# Altium PCB RaspberryPi3BP-Layout.pcbdoc
Units mm, origin at the board's own origin, x right, y up, seen from the top; angles counter-clockwise.
Board outline 140.12 x 120.2 mm, 2 copper layers (Top Layer, Bottom Layer); 37 components, 155 nets, 205 pads, 0 vias.
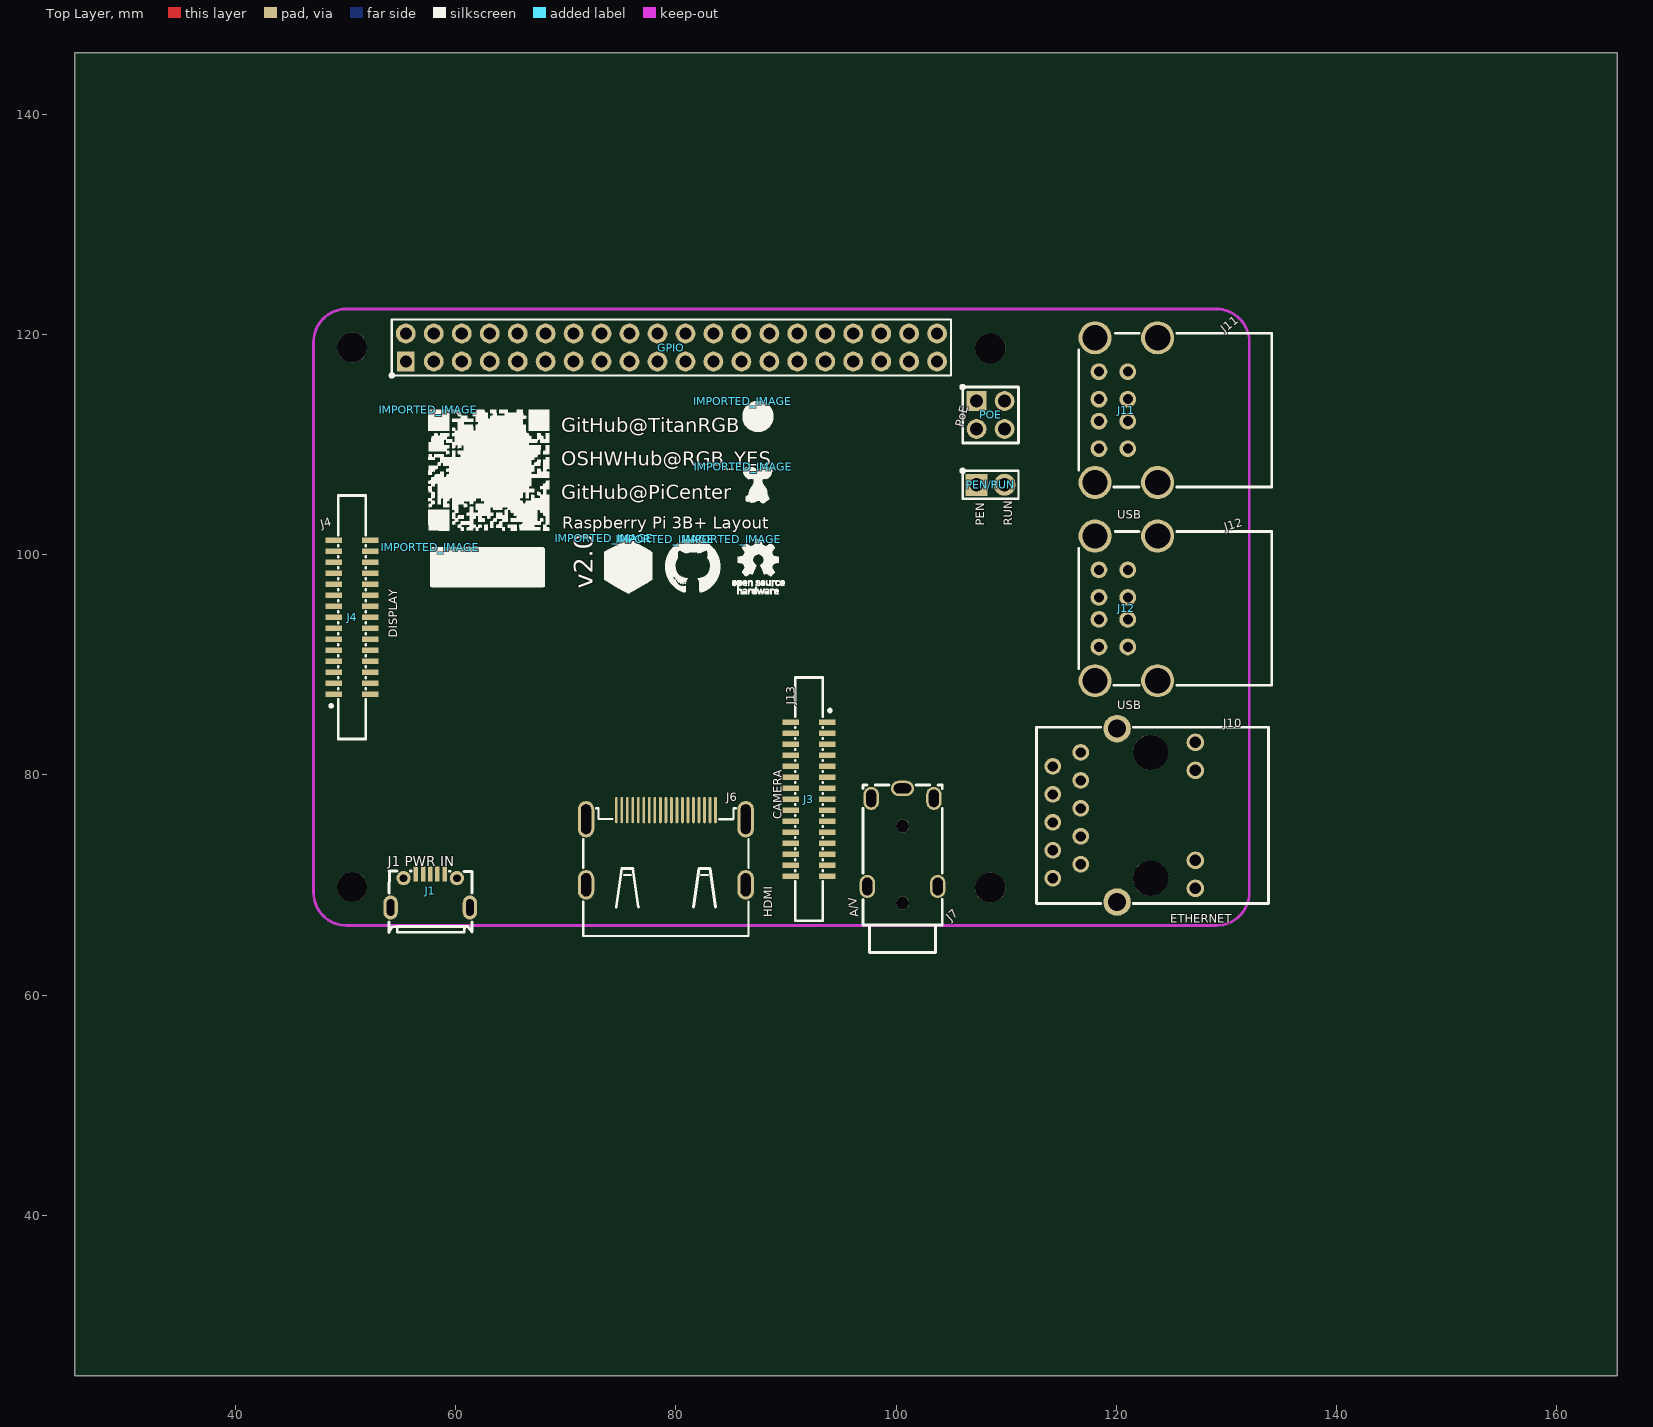
[diagram p0: Top Layer view]
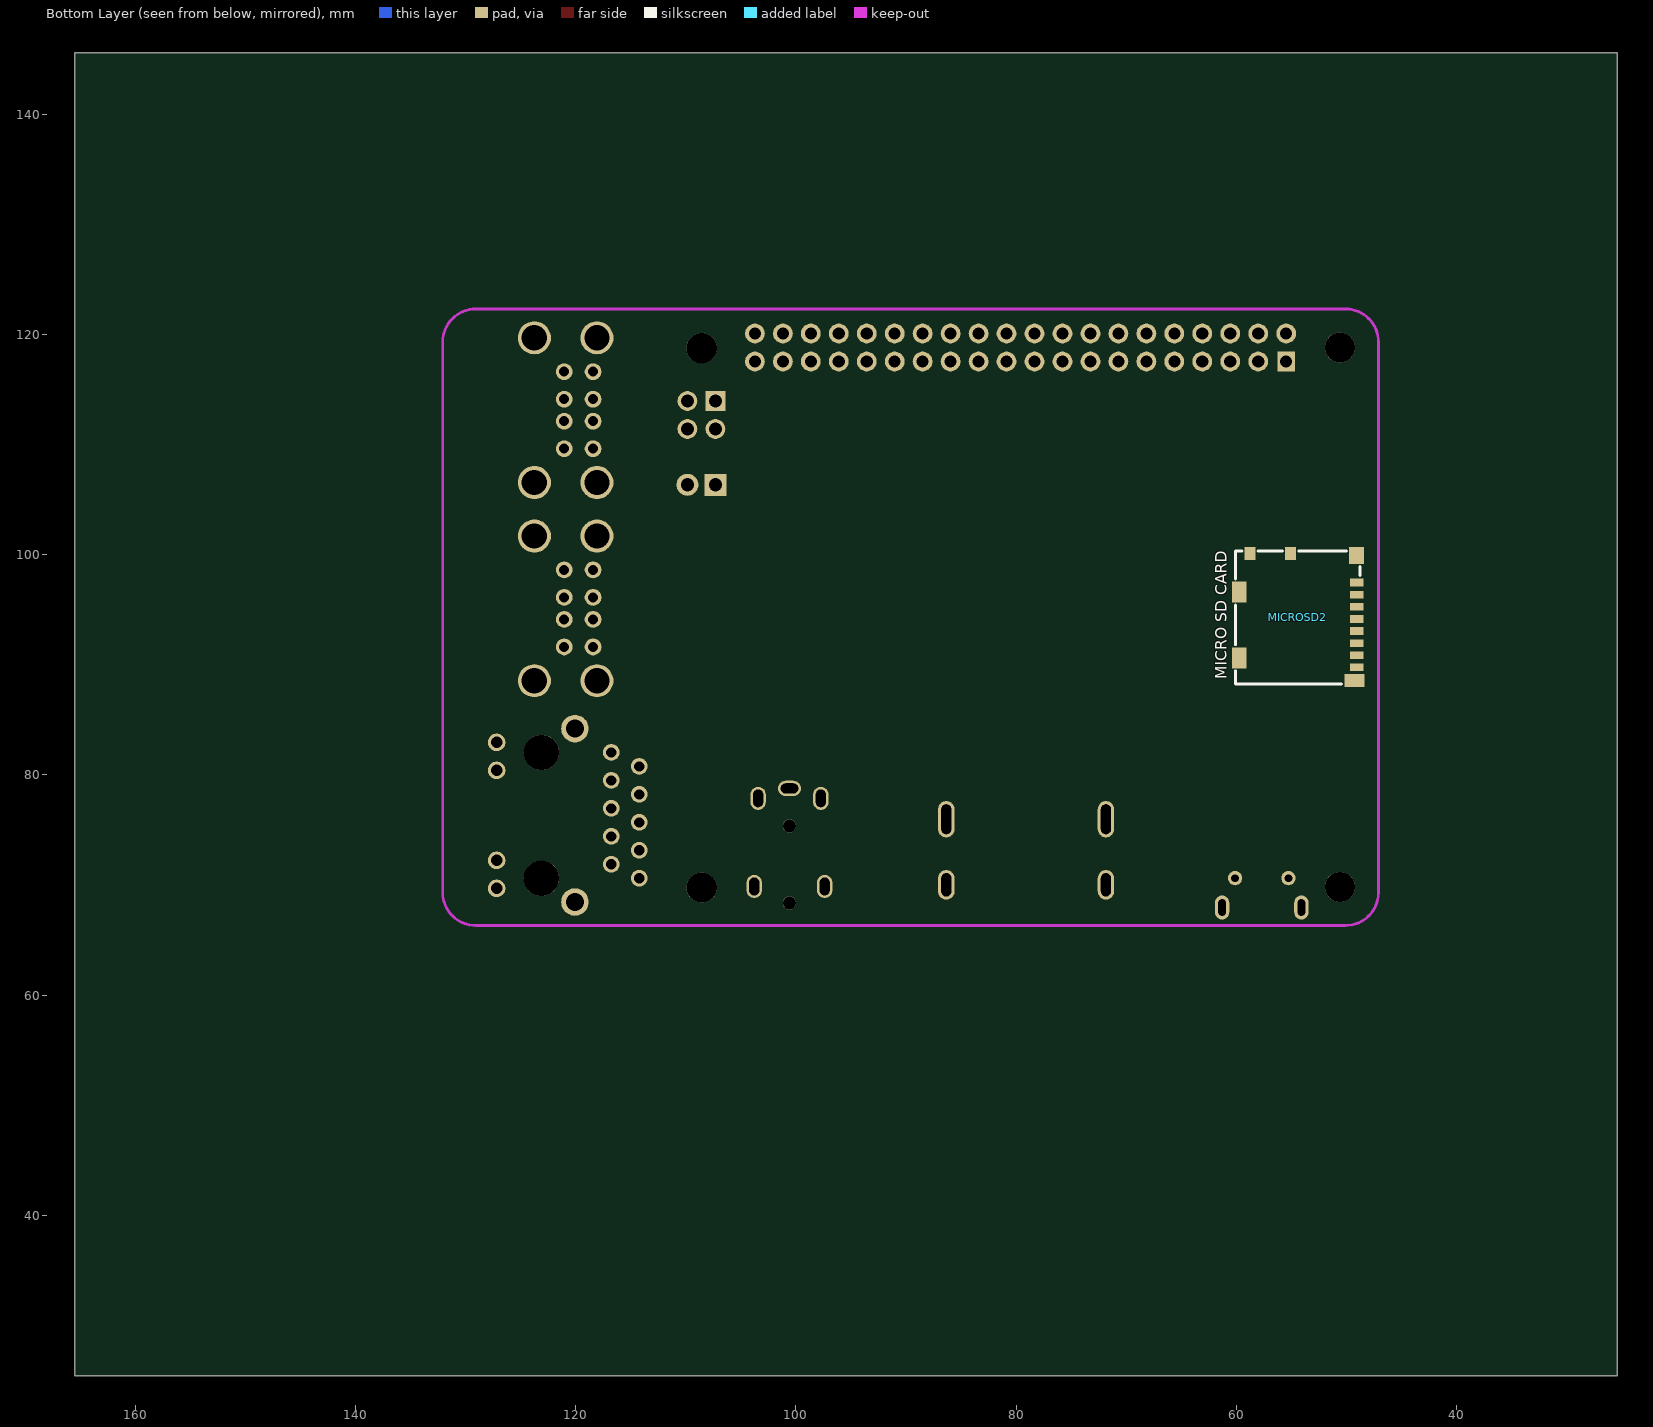
[diagram p1: Bottom Layer view, seen from below]

## Layer stack, top to bottom
Top Layer: signal copper (thickness not stored)
Dielectric: dielectric 0.32, FR-4, Dk 4.8
Bottom Layer: signal copper (thickness not stored)

## Board outline
165.516,25.4 25.4,25.4 25.4,145.599 165.516,145.599

## Components (designator, comment, footprint, x,y, rotation, side; value= is the part's Value field where it differs from the comment)
GPIO "Header-Male-2.54_2x20" HDR-TH_40P-P2.54-V-M-R2-C20-S2.54 79.605,118.821 r0 top
IMPORTED_IMAGE "IMPORTED_IMAGE" IMPORTED_IMAGE 79.039,101.411 r0 top
IMPORTED_IMAGE "IMPORTED_IMAGE" IMPORTED_IMAGE 85.112,101.393 r0 top
IMPORTED_IMAGE "IMPORTED_IMAGE" IMPORTED_IMAGE 86.063,113.959 r0 top
IMPORTED_IMAGE "IMPORTED_IMAGE" IMPORTED_IMAGE 73.505,101.51 r0 top
IMPORTED_IMAGE "IMPORTED_IMAGE" IMPORTED_IMAGE 57.694,100.687 r0 top
IMPORTED_IMAGE "IMPORTED_IMAGE" IMPORTED_IMAGE 86.103,107.982 r0 top
IMPORTED_IMAGE "IMPORTED_IMAGE" IMPORTED_IMAGE 57.511,113.189 r0 top
J1 "PWR IN" MICRO-USB-SMD_MICROXNJ 57.694,69.476 r0 top
J3 "CAMERA" FPC-SMD_15P-P1.00_HDGC_1.0K-GT-15PB 92.094,77.801 r270 top
J4 "DISPLAY" FPC-SMD_15P-P1.00_HDGC_1.0K-GT-15PB 50.593,94.322 r90 top
J6 "HDMI" HDMI-SMD_HDMI-019S 79.097,73.411 r0 top
J7 "A/V" AUDIO-TH_HOOYA_PJ-322 100.593,74.321 r90 top
J10 "ETHERNET" RJ45-TH_XKB_X01AQ068DB2AD 120.715,76.329 r90 top
J11 "USB" USB-A-TH_U-USBAR04P-F201 120.924,113.13 r90 top
J12 "USB" USB-A-TH_U-USBAR04P-F201 120.924,95.124 r90 top
MICROSD2 "1040310811" SIM-SMD_8P-1040310811 54.402,94.332 r270 bottom
PEN/RUN "KH-2.54PH180-1X2P-L11.5" HDR-TH_2P-P2.54-V-M 108.594,106.353 r0 top
POE "210-72-02GB01" HDR-TH_4P-P2.54-V-R2-C2-S2.54_A2541WV-2X2P 108.594,112.692 r270 top
? "" ? 95.091,72.065 r0 top
? "" ? 85.598,58.417 r0 top
? "" ? 42.622,80.315 r0 top
? "" ? 66.605,54.773 r0 top
? "" ? 108.493,61.305 r0 top
? "" ? 113.313,123.73 r0 top
? "" ? 136.933,80.815 r0 top
? "" ? 48.844,99.574 r0 top
? "" ? 99.93,68.049 r0 top
? "" ? 79.594,83.684 r0 top
? "" ? 73.844,55.827 r0 top
? "" ? 52.395,63.594 r0 top
? "" ? 63.094,58.414 r0 top
? "" ? 138.427,71.425 r0 top
? "" ? 134.77,89.8 r0 top
? "" ? 103.718,114.327 r0 top
? "" ? 98.897,120.572 r0 top
? "" ? 100.356,117.51 r0 top

## Footprints (in the part's own frame and the unit in brackets; to place one, negate y for a bottom-side part, rotate by r counter-clockwise, add the part's x,y. Pads: shape width x height; smd on the part's side, far side on the other; paste and mask are expansions set on the pad)
AUDIO-TH_HOOYA_PJ-322 [mm]
  oval 1.4x2.1 hole 0.9 slot 1.6 at 90 deg: 1(4.45,0)
  oval 2.1x1.4 hole 0.9 slot 1.6 at 0 deg: 2(3.55,2.85) 3(-4.45,-3.2) 3(-4.45,3.2) 4(3.55,-2.85)
  round 1.2 hole 1.2 unplated: ""(-5.95,0) ""(1.05,0)
  silkscreen extent -10.45,-3.6 4.75,3.6
FPC-SMD_15P-P1.00_HDGC_1.0K-GT-15PB [mm]
  rect 0.5x1.5 smd: 1(-7,-1.65) 1(-7,1.65) 2(-6,-1.65) 2(-6,1.65) 3(-5,-1.65) 3(-5,1.65) 4(-4,-1.65) 4(-4,1.65) 5(-3,1.65) 5(-3,-1.65) 6(-2,1.65) 6(-2,-1.65) 7(-1,1.65) 7(-1,-1.65) 8(0,1.65) 8(0,-1.65) 9(1,1.65) 9(1,-1.65) 10(2,1.65) 10(2,-1.65) 11(3,1.65) 11(3,-1.65) 12(4,-1.65) 12(4,1.65) 13(5,-1.65) 13(5,1.65) 14(6,-1.65) 14(6,1.65) 15(7,-1.65) 15(7,1.65)
  silkscreen extent -11.05,-1.25 11.05,2.03
HDMI-SMD_HDMI-019S [mm]
  oval 0.25x2.4 smd: 1(4.501,3.396) 2(4.001,3.396) 3(3.501,3.396) 4(3.001,3.396) 5(2.5,3.396) 6(2,3.396) 7(1.5,3.396) 8(1,3.396) 9(0.5,3.396) 10(0,3.396) 11(-0.5,3.396) 12(-1,3.396) 13(-1.5,3.396) 14(-2,3.396) 15(-2.5,3.396) 16(-3.001,3.396) 17(-3.501,3.396) 18(-4.001,3.396) 19(-4.501,3.396)
  oval 1.5x2.7 hole 0.9 slot 2.1 at 90 deg: 20(7.251,-3.397) 21(-7.251,-3.397)
  oval 1.5x3.3 hole 0.9 slot 2.7 at 90 deg: 22(7.251,2.563) 23(-7.251,2.563)
  silkscreen extent -7.5,-8.04 7.5,3.56
HDR-TH_2P-P2.54-V-M [mm]
  rect 2x2 hole 1.2: 1(-1.27,0)
  round 2 hole 1.2: 2(1.27,0)
  silkscreen extent -2.54,-1.27 2.54,1.27
HDR-TH_4P-P2.54-V-R2-C2-S2.54_A2541WV-2X2P [mm]
  rect 1.8x1.8 hole 1.2: 1(-1.27,-1.27)
  round 1.8 hole 1.2: 2(-1.27,1.27) 3(1.27,-1.27) 4(1.27,1.27)
  silkscreen extent -2.54,-2.54 2.54,2.54
HDR-TH_40P-P2.54-V-M-R2-C20-S2.54 [mm]
  rect 1.575x1.8 hole 1.1: 1(-24.13,-1.27)
  round 1.8 hole 1.1: 2(-24.13,1.27) 3(-21.59,-1.27) 4(-21.59,1.27) 5(-19.05,-1.27) 6(-19.05,1.27) 7(-16.51,-1.27) 8(-16.51,1.27) 9(-13.97,-1.27) 10(-13.97,1.27) 11(-11.43,-1.27) 12(-11.43,1.27) 13(-8.89,-1.27) 14(-8.89,1.27) 15(-6.35,-1.27) 16(-6.35,1.27) 17(-3.81,-1.27) 18(-3.81,1.27) 19(-1.27,-1.27) 20(-1.27,1.27) 21(1.27,-1.27) 22(1.27,1.27) 23(3.81,-1.27) 24(3.81,1.27) 25(6.35,-1.27) 26(6.35,1.27) 27(8.89,-1.27) 28(8.89,1.27) 29(11.43,-1.27) 30(11.43,1.27) 31(13.97,-1.27) 32(13.97,1.27) 33(16.51,-1.27) 34(16.51,1.27) 35(19.05,-1.27) 36(19.05,1.27) 37(21.59,-1.27) 38(21.59,1.27) 39(24.13,-1.27) 40(24.13,1.27)
  silkscreen extent -25.4,-2.54 25.4,2.54
IMPORTED_IMAGE [mm]
  silkscreen extent 0,-4.83 4.98,0
MICRO-USB-SMD_MICROXNJ [mm]
  rect 0.4x1.4 smd: 1(-1.3,1.521) 2(-0.65,1.521) 3(0,1.521) 4(0.65,1.521) 5(1.3,1.521)
  round 1.3 hole 0.7: 6(2.425,1.149) 9(-2.425,1.149)
  oval 1.3x2.2 hole 0.7 slot 1.5 at 90 deg: 7(3.6,-1.521) 8(-3.6,-1.521)
  silkscreen extent -3.76,-3.78 3.8,1.79
RJ45-TH_XKB_X01AQ068DB2AD [mil]
  round 60 hole 36: 1(-225,254.92) 2(-175,154.92) 3(-125,254.92) 4(-75,154.92) 5(-25,254.92) 6(25,154.92) 7(75,254.92) 8(125,154.92) 9(175,254.92) 10(225,154.92)
  round 62.99 hole 40.16: 11(-261.02,-254.92) 12(-161.03,-254.92) 13(161.02,-254.92) 14(261.02,-254.92)
  round 98.42 hole 64.96: 15(-310.03,25) 16(310.04,25)
  round 125.98 hole 125.98 unplated: ""(-225,-95.08) ""(225,-95.08)
  silkscreen extent -315,-517 315,313
SIM-SMD_8P-1040310811 [mm]
  rect 0.7x1.2 smd: 1(-3.138,5.338) 2(-2.038,5.338) 3(-0.938,5.338) 4(0.162,5.338) 5(1.262,5.338) 6(2.362,5.338) 7(3.462,5.338) 8(4.562,5.337)
  rect 1.17x1.8 smd: 9(5.772,5.138)
  rect 1.55x1.35 smd: 10(-5.598,5.312)
  rect 1.2x1 smd: 11(-5.773,-0.663) 12(-5.773,-4.363)
  rect 1.9x1.35 smd: 13(-2.273,-5.338) 14(3.697,-5.338)
  silkscreen extent -5.99,-5.67 6.07,5.64
USB-A-TH_U-USBAR04P-F201 [mil]
  round 60 hole 36: 1(-137.8,98.03) 2(-39.37,98.03) 3(39.37,98.03) 4(137.8,98.03) 5(-137.8,-5.12) 6(-39.37,-5.12) 7(39.37,-5.12) 8(137.8,-5.12)
  round 118.11 hole 90.55: 9(-258.66,-111.81) 9(-258.66,111.81) 9(258.66,-111.81) 9(258.66,111.81)
  silkscreen extent -275,-520 275,170
? [mm]

## Free pads (board coordinates)
  round 2.75 hole 2.75 unplated: 1(50.594,69.822) 1(50.594,118.822) 1(108.562,69.766) 1(108.562,118.766)

## Nets (pads, with @x,y where several pads share a name; then routed paths per layer and width w, separated by ;. In a path a pad name is that pad's centre, name@x,y a point inside that pad or via, vN(x,y) a via of type N, cw(c..) or ccw(c..) an arc to the next point about the centre after c; other vN are vias at no path point)
GND: MICROSD2.6 MICROSD2.9 MICROSD2.10 MICROSD2.11 MICROSD2.12 MICROSD2.13 MICROSD2.14
GPIO_1: GPIO.1
GPIO_2: GPIO.2
GPIO_3: GPIO.3
GPIO_4: GPIO.4
GPIO_5: GPIO.5
GPIO_6: GPIO.6
GPIO_7: GPIO.7
GPIO_8: GPIO.8
GPIO_9: GPIO.9
GPIO_10: GPIO.10
GPIO_11: GPIO.11
GPIO_12: GPIO.12
GPIO_13: GPIO.13
GPIO_14: GPIO.14
GPIO_15: GPIO.15
GPIO_16: GPIO.16
GPIO_17: GPIO.17
GPIO_18: GPIO.18
GPIO_19: GPIO.19
GPIO_20: GPIO.20
GPIO_21: GPIO.21
GPIO_22: GPIO.22
GPIO_23: GPIO.23
GPIO_24: GPIO.24
GPIO_25: GPIO.25
GPIO_26: GPIO.26
GPIO_27: GPIO.27
GPIO_28: GPIO.28
GPIO_29: GPIO.29
GPIO_30: GPIO.30
GPIO_31: GPIO.31
GPIO_32: GPIO.32
GPIO_33: GPIO.33
GPIO_34: GPIO.34
GPIO_35: GPIO.35
GPIO_36: GPIO.36
GPIO_37: GPIO.37
GPIO_38: GPIO.38
GPIO_39: GPIO.39
GPIO_40: GPIO.40
J1_1: J1.1
J1_2: J1.2
J1_3: J1.3
J1_4: J1.4
J1_5: J1.5
J1_6: J1.6
J1_7: J1.7
J1_8: J1.8
J1_9: J1.9
J3_1: J3.1
J3_2: J3.2
J3_3: J3.3
J3_4: J3.4
J3_5: J3.5
J3_6: J3.6
J3_7: J3.7
J3_8: J3.8
J3_9: J3.9
J3_10: J3.10
J3_11: J3.11
J3_12: J3.12
J3_13: J3.13
J3_14: J3.14
J3_15: J3.15
J4_1: J4.1
J4_2: J4.2
J4_3: J4.3
J4_4: J4.4
J4_5: J4.5
J4_6: J4.6
J4_7: J4.7
J4_8: J4.8
J4_9: J4.9
J4_10: J4.10
J4_11: J4.11
J4_12: J4.12
J4_13: J4.13
J4_14: J4.14
J4_15: J4.15
J6_1: J6.1
J6_2: J6.2
J6_3: J6.3
J6_4: J6.4
J6_5: J6.5
J6_6: J6.6
J6_7: J6.7
J6_8: J6.8
J6_9: J6.9
J6_10: J6.10
J6_11: J6.11
J6_12: J6.12
J6_13: J6.13
J6_14: J6.14
J6_15: J6.15
J6_16: J6.16
J6_17: J6.17
J6_18: J6.18
J6_19: J6.19
J6_20: J6.20
J6_21: J6.21
J6_22: J6.22
J6_23: J6.23
J7_1: J7.1
J7_2: J7.2
J7_3: J7.3
J7_4: J7.4
J10_1: J10.1
J10_2: J10.2
J10_3: J10.3
J10_4: J10.4
J10_5: J10.5
J10_6: J10.6
J10_7: J10.7
J10_8: J10.8
J10_9: J10.9
J10_10: J10.10
J10_11: J10.11
J10_12: J10.12
J10_13: J10.13
J10_14: J10.14
J10_15: J10.15
J10_16: J10.16
J11_1: J11.1
J11_2: J11.2
J11_3: J11.3
J11_4: J11.4
J11_5: J11.5
J11_6: J11.6
J11_7: J11.7
J11_8: J11.8
J11_9: J11.9
J12_1: J12.1
J12_2: J12.2
J12_3: J12.3
J12_4: J12.4
J12_5: J12.5
J12_6: J12.6
J12_7: J12.7
J12_8: J12.8
J12_9: J12.9
PEN/RUN_1: PEN/RUN.1
PEN/RUN_2: PEN/RUN.2
POE_1: POE.1
POE_2: POE.2
POE_3: POE.3
POE_4: POE.4
S$31: 
SDMMC_CLK: MICROSD2.5
SDMMC_CMD: MICROSD2.3
SDMMC_D0: MICROSD2.7
SDMMC_D1: MICROSD2.8
SDMMC_D2: MICROSD2.1
SDMMC_D3: MICROSD2.2
VDD_3V3: MICROSD2.4
pads on no net: J7. J10.

## Keep-outs
Keep-Out Layer:
  lines w0.254: 47.094,69.322 ccw(c50.094,69.322) 50.094,66.322 ; 47.094,119.322 cw(c50.094,119.322) 50.094,122.322 ; 129.094,66.322 ccw(c129.094,69.322) 132.094,69.322 ; 129.094,122.322 cw(c129.094,119.322) 132.094,119.322

## Silkscreen, mask and mechanical layers (free items; w line width, h text height)
Top Overlay:
  circle w0.203: c106.054,107.622 r0.195
  circle w0.203: c106.054,115.232 r0.195
  circle w0.203: c106.054,115.232 r0.195
  circle w0.203: c54.206,116.282 r0.195
  text "J11" at 129.839,120.099 h0.76 r38
  text "PoE" at 106.099,111.544 h0.76 r76
  text "GitHub@TitanRGB" at 69.573,111.145 h1.3
  text "OSHWHub@RGB_YES" at 69.573,108.097 h1.3
  text "GitHub@PiCenter" at 69.573,105.049 h1.3
  text "USB" at 120.08,103.254 h0.76
  text "PEN" at 108.015,102.619 h0.76 r90
  text "RUN" at 110.555,102.619 h0.76 r90
  text "J4" at 47.827,102.396 h0.76 r15
  text "Raspberry Pi 3B+ Layout" at 69.7,102.355 h1.1
  text "J12" at 129.97,102.127 h0.76 r17
  text "v2.0" at 72.455,96.922 h1.7 r90
  text "DISPLAY" at 54.714,92.477 h0.76 r90
  text "J13" at 90.782,86.381 h0.76 r90
  text "USB" at 120.08,85.982 h0.76
  text "CAMERA" at 89.639,75.967 h0.76 r90
  text "J1 PWR IN" at 53.825,71.712 h0.89
  text "A/V" at 96.621,67.123 h0.76 r97
  text "HDMI" at 88.75,67.077 h0.76 r90
  text "ETHERNET" at 124.906,66.551 h0.76
Bottom Overlay:
  text "MICRO SD CARD" at 60.881,88.69 h1.02 r270